# Altium PCB PCB1.PcbDoc
Units mil, origin at the board's own origin, x right, y up, seen from the top; angles counter-clockwise.
Board outline 6000 x 4000 mil, 2 copper layers (Top Layer, Bottom Layer); 27 components, 0 nets, 68 pads, 0 vias.
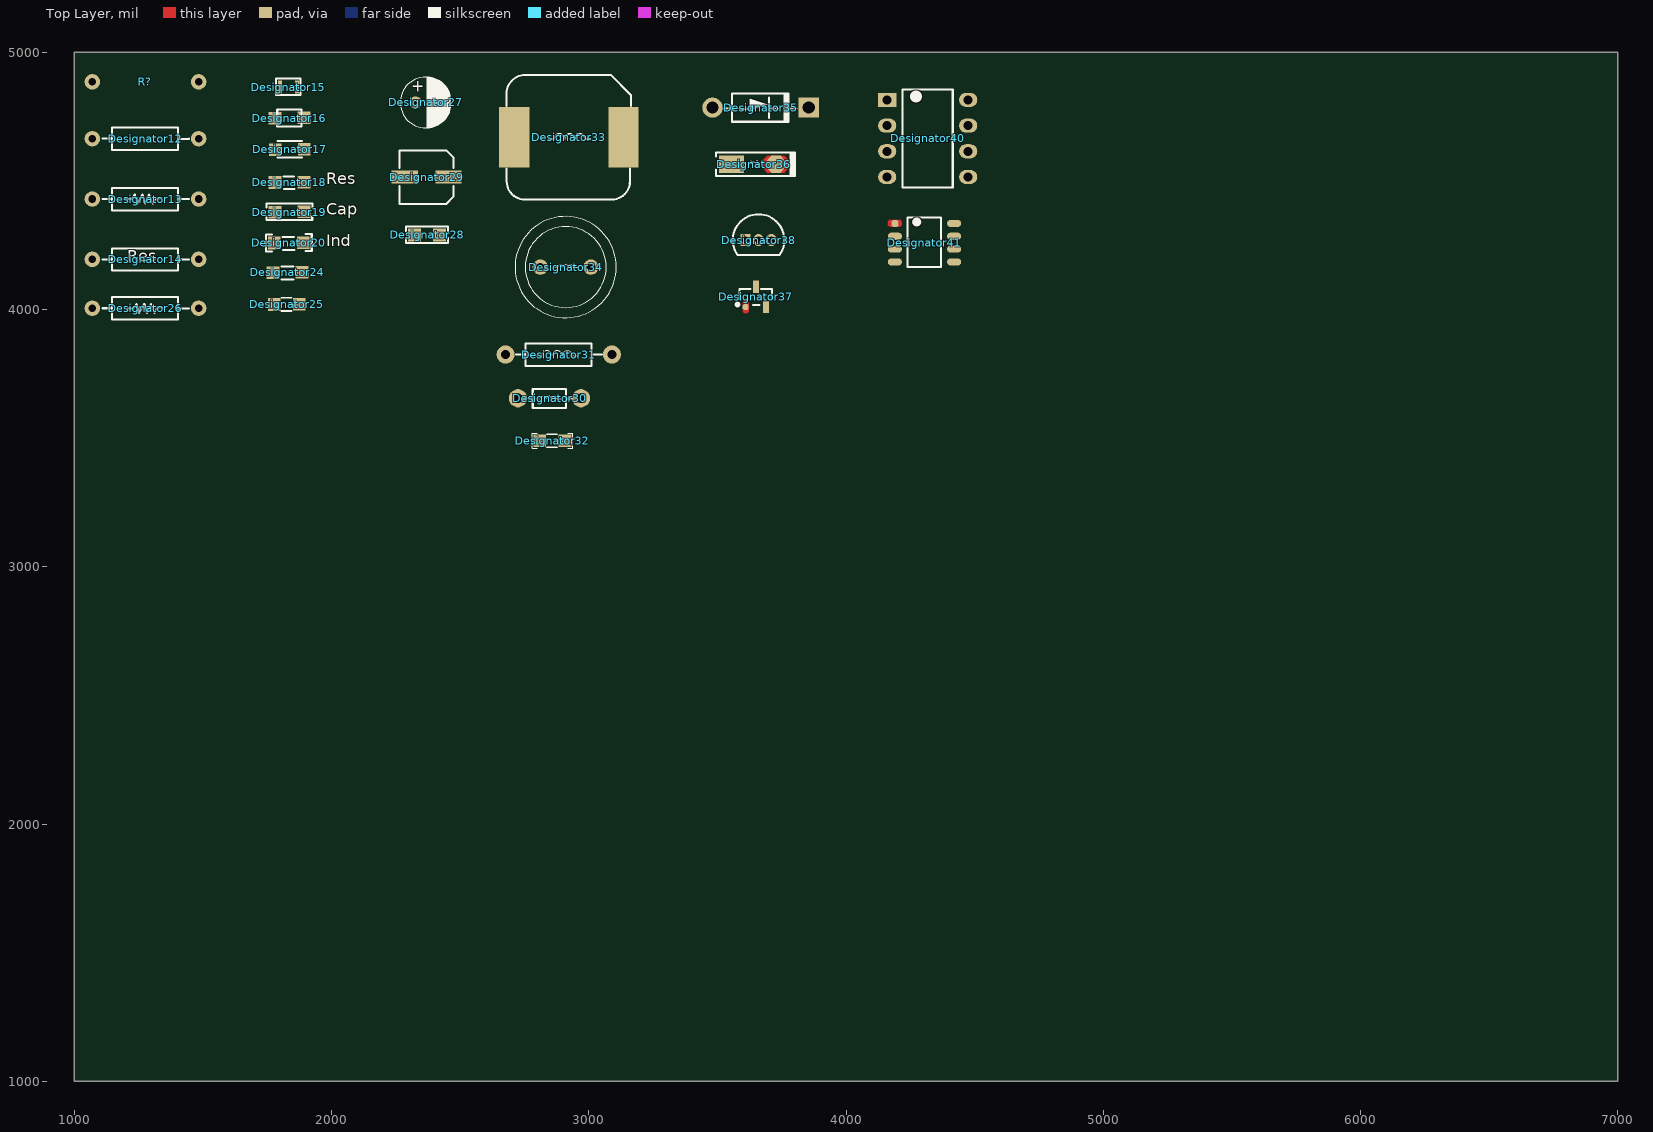
[diagram p0: Top Layer view]
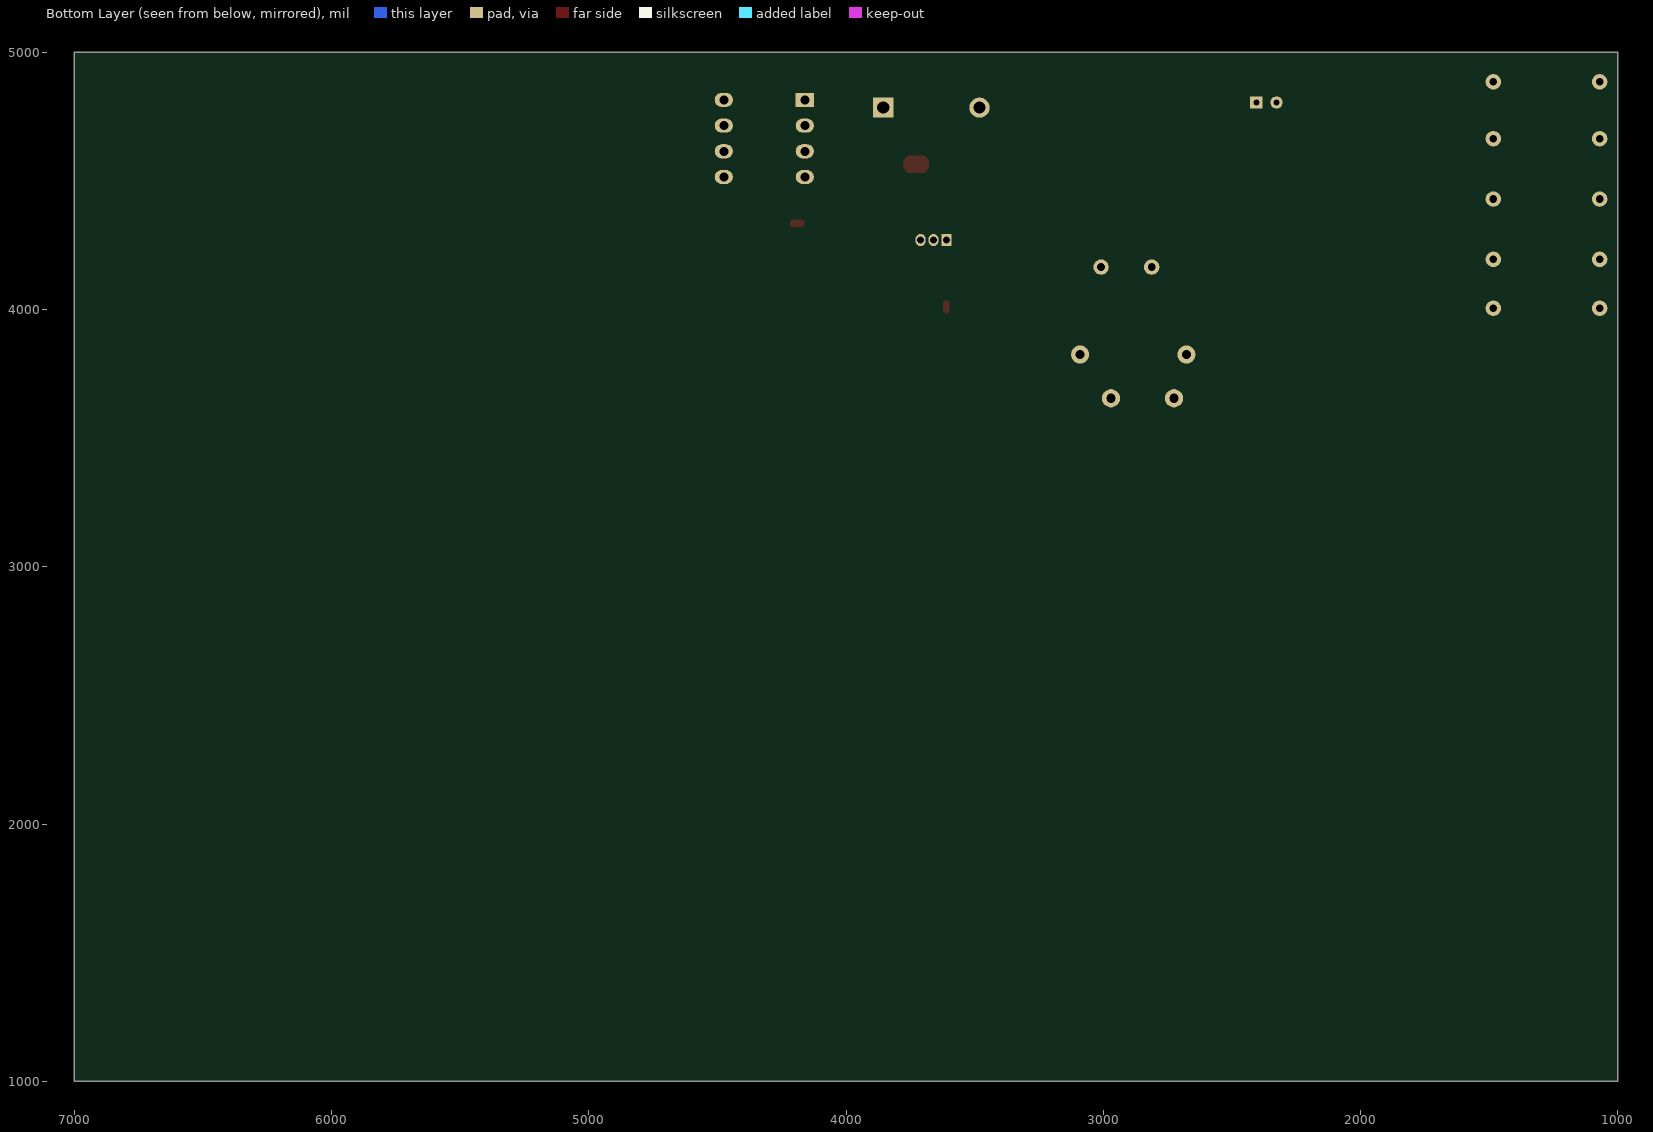
[diagram p1: Bottom Layer view, seen from below]

## Layer stack, top to bottom
Top Solder: solder mask 0.4, Solder Resist, Dk 3.5
Top Layer: signal copper 1.4
Dielectric 1: dielectric 12.6, FR-4, Dk 4.8
Bottom Layer: signal copper 1.4
Bottom Solder: solder mask 0.4, Solder Resist, Dk 3.5

## Board outline
1000,1000 7000,1000 7000,5000 1000,5000

## Design rules (kind name [scope] priority, off if disabled: settings)
Clearance [All] p1: gap=10 ignorepadtopadclearanceinfootprint=FALSE
PolygonConnect [All] p1: connectstyle=Relief reliefconductorwidth=10 reliefentries=4 polygonreliefangle="90 Angle" airgapwidth=10
RoutingVias [All] p1: holewidth=28 width=50 viastyle="Through Hole" minholewidth=28 minwidth=50 maxholewidth=28 maxwidth=50
SolderMaskExpansion [All] p1: expansion=4 istentingtop=FALSE
Width [All] p1: maxlimit=10 minlimit=10 preferedwidth=10
30 further rules are at their usual default settings.

## Classes and differential pairs
component class Sheet1: R?

## Components (designator, comment, footprint, x,y, rotation, side; value= is the part's Value field where it differs from the comment)
Designator12 "Comment" Res_THT_1/4 1070,4664.05 r0 top
Designator13 "Comment" Res_THT_1/4 1070,4429.53 r0 top
Designator14 "Comment" Res_THT_1/4 1070,4195 r0 top
Designator15 "Comment" Res_SMD_0805#1 1764.85,4863.5 r0 top
Designator16 "Comment" Res_SMD_0805#2 1768.98,4741.98 r0 top
Designator17 "Comment" Res_SMD_0805#2 1770,4620.46 r0 top
Designator18 "Comment" Res_SMD_0805#2 1768.98,4492.33 r0 top
Designator19 "Comment" Res_SMD_0805#2 1768.98,4376.81 r0 top
Designator20 "Comment" Res_SMD_0805#2 1766.24,4257.09 r0 top
Designator24 "Comment" Res_SMD_0805#2 1761.24,4142.09 r0 top
Designator25 "Comment" Res_SMD_0805#3 1759.82,4018.33 r0 top
Designator26 "Comment" Res_THT_1/4 1070,4005 r0 top
Designator27 "Comment" Cap_Elec_THT 2365.63,4805 r0 top
Designator28 "Comment" Cap_SMD_0805 2304.82,4288.33 r0 top
Designator29 "Comment" Cap_Elec_SMD_5x5.4 2265,4410 r0 top
Designator30 "Comment" IND_THT_1/8 2705,3655 r0 top
Designator31 "Comment" IND_THT_1/4 2676.61,3825 r0 top
Designator32 "Comment" Ind_SMD_0805 2792.41,3488.61 r0 top
Designator33 "Comment" Ind_SMD_Power_D128C 2680,4427.87 r0 top
Designator34 "Comment" Ind_Drum_10x12 2910,4165 r0 top
Designator35 "Comment" DO-41 3480.98,4785 r0 top
Designator36 "Comment" SMA-DO214AC 3555,4565 r0 top
Designator37 "Comment" SOT-23 3688.74,4010 r90 top
Designator38 "Comment" TO-92 3660,4270 r0 top
Designator40 "Comment" PDIP-8 4160.04,4515 r0 top
Designator41 "Comment" SOIC-8 4190,4185 r0 top
R? "Res_THT" Res_THT_1/4 1070,4885 r0 top

## Footprints (in the part's own frame and the unit in brackets; to place one, negate y for a bottom-side part, rotate by r counter-clockwise, add the part's x,y. Pads: shape width x height; smd on the part's side, far side on the other; paste and mask are expansions set on the pad)
Cap_Elec_SMD_5x5.4 [mil]
  rect 102.36x51.18 smd: N(20,105) P(190,105)
  silkscreen extent 0,0 209,209, body extent -19,1 229,209, height 224
Cap_Elec_THT [mm]
  rect 1.2x1.2 hole 0.6: N(1,0)
  round 1.2 hole 0.6: P(-1,0)
  silkscreen extent -2.5,-2.54 2.5,2.54, body extent -2.5,-2.49 2.5,2.49, height 11.35
Cap_SMD_0805 [mm]
  rect 1.25x1.25 smd: 1(0.447,0.035) 2(2.926,0.043)
  silkscreen extent -0.38,-0.76 3.75,0.89, body extent 0.69,-0.6 2.69,0.67, height 1.27
DO-41 [mm]
  round 2 hole 1.2: A(0,0)
  rect 2x2 hole 1.2: K(9.5,0)
  silkscreen extent 1.1,-1.4 8.29,1.4, body extent -0.48,-1.35 9.91,1.35, height 2.83
Ind_Drum_10x12 [mil]
  round 60 hole 30: 1(-98.43,0) 2(98.43,0)
  silkscreen extent -197,-197 197,197, body extent -198,-198 196,195, height 478
Ind_SMD_0805 [mm]
  rect 1.25x1.25 smd: 1(0.447,0.035) 2(2.926,0.043)
  silkscreen extent -0.32,-0.73 3.69,0.79, body extent 0.63,-0.65 2.68,0.65, height 0.5
Ind_SMD_Power_D128C [mm]
  rect 3x6 smd: 1(0.762,6.15) 2(11.557,6.15)
  silkscreen extent 0,0 12.3,12.3, body extent -0.06,0.07 12.25,12.37, height 8.16
IND_THT_1/4 [mm]
  round 1.8 hole 0.9: 1(0,0) 2(10.5,0)
  silkscreen extent 1.02,-1.11 9.53,1.09
IND_THT_1/8 [mm]
  round 1.8 hole 0.9: 1(0.508,0) 2(6.731,0)
  silkscreen extent 1.52,-0.98 5.72,0.92, body extent 0.18,-0.98 7.04,0.85, height 1.92
PDIP-8 [mm]
  rect 1.8x1.4 hole 0.9: 1(0,7.62)
  oval 1.8x1.4 hole 0.9: 2(0,5.08) 3(0,2.54) 4(0,0) 5(8,0) 6(8,2.54) 7(8,5.08) 8(8,7.62)
  silkscreen extent 1.52,-1.02 6.48,8.64, body extent -0.63,-1.09 8.51,8.71, height 3.21
Res_SMD_0805#1 [mm]
  rect 0.4x1.25 smd: 1(0.889,0.035) 2(2.544,0.038)
  silkscreen extent 0.51,-0.76 2.92,0.89
Res_SMD_0805#2 [mm]
  rect 1.25x1.25 smd: 1(0.28,0.033) 2(3.143,0.074)
  silkscreen extent 0.51,-0.76 2.92,0.89
Res_SMD_0805#3 [mm]
  rect 1.25x1.25 smd: 1(0.447,0.035) 2(2.926,0.043)
  silkscreen extent 1.13,-0.61 2.16,0.68, body extent 0.68,-0.59 2.71,0.68, height 0.6
Res_THT_1/4 [mil]
  round 60 hole 30: 1(0,0) 2(413.39,0)
  silkscreen extent 40,-44 375,43
SMA-DO214AC [mm]
  rect 2.5x1.7 smd: A(0,0)
  oct 1.7x1.7 smd: K(4.375,0)
  Top Layer region: 3.55,-0.85 3.125,-0.425 3.125,0.425 3.55,0.85 5.2,0.85 5.625,0.425 5.625,-0.425 5.2,-0.85
  silkscreen extent -1.52,-1.14 6.28,1.14, body extent -0.31,-1.37 4.89,1.37, height 2.4
SOIC-8 [mm]
  oct 0.7x0.7 smd: 1(0,3.81)
  oval 1.4x0.7 smd: 2(0,2.54) 3(0,1.27) 4(0,0) 5(5.85,0) 6(5.85,1.27) 7(5.85,2.54) 8(5.85,3.81)
  Top Layer region: -0.525,3.46 -0.7,3.635 -0.7,3.985 -0.525,4.16 0.525,4.16 0.7,3.985 0.7,3.635 0.525,3.46
  silkscreen extent 1.27,-0.51 4.57,4.39, body extent -0.18,-0.51 6.02,4.32, height 1.7
SOT-23 [mm]
  oct 0.6x0.6 smd: 1(0,2)
  rect 1.2x0.6 smd: 2(2,1) 3(0,0)
  Top Layer region: -0.45,1.7 -0.6,1.85 -0.6,2.15 -0.45,2.3 0.45,2.3 0.6,2.15 0.6,1.85 0.45,1.7
  silkscreen extent 0.19,-0.6 1.78,2.6, body extent -0.25,-0.51 2.29,2.49, height 1.1
TO-92 [mm]
  rect 1x1.2 hole 0.7: 1(-1.27,0)
  oval 1x1.2 hole 0.7: 2(0,0) 3(1.27,0)
  silkscreen extent -2.54,-1.46 2.54,2.54, body extent -2.61,-1.59 2.61,2.61, height 8

## Nets (pads, with @x,y where several pads share a name; then routed paths per layer and width w, separated by ;. In a path a pad name is that pad's centre, name@x,y a point inside that pad or via, vN(x,y) a via of type N, cw(c..) or ccw(c..) an arc to the next point about the centre after c; other vN are vias at no path point)
pads on no net: Designator12.1 Designator12.2 Designator13.1 Designator13.2 Designator14.1 Designator14.2 Designator15.1 Designator15.2 Designator16.1 Designator16.2 Designator17.1 Designator17.2 Designator18.1 Designator18.2 Designator19.1 Designator19.2 Designator20.1 Designator20.2 Designator24.1 Designator24.2 Designator25.1 Designator25.2 Designator26.1 Designator26.2 Designator27.N Designator27.P Designator28.1 Designator28.2 Designator29.N Designator29.P Designator30.1 Designator30.2 Designator31.1 Designator31.2 Designator32.1 Designator32.2 Designator33.1 Designator33.2 Designator34.1 Designator34.2 Designator35.A Designator35.K Designator36.A Designator36.K Designator37.1 Designator37.2 Designator37.3 Designator38.1 Designator38.2 Designator38.3 Designator40.1 Designator40.2 Designator40.3 Designator40.4 Designator40.5 Designator40.6 Designator40.7 Designator40.8 Designator41.1 Designator41.2 Designator41.3 Designator41.4 Designator41.5 Designator41.6 Designator41.7 Designator41.8 R?.1 R?.2

## Silkscreen, mask and mechanical layers (free items; w line width, h text height)
Top Overlay:
  text "Res" at 1980,4470.8 h78.74
  text "Cap" at 1980,4353.77 h78.74
  text "Ind" at 1980,4230.8 h78.74

## Text inside footprints (layer, text, board x,y; h text height)
Designator14: Top Overlay "Res" at 1205,4170.8 h78.74
Designator27: Top Overlay "+" at 2310.63,4831.84 h78.74
Designator35: Top Overlay "►" at 3626.09,4746.53 h118.11
Designator36: Top Overlay "►" at 3630.04,4555.51 h39.37
Designator37: Top Overlay "●" at 3594.79,4004.44 h39.37 r90
Designator40: Top Overlay "●" at 4245.04,4795.33 h78.74
Designator41: Top Overlay "●" at 4255,4316.51 h59.06